# EAGLE board ray (EAGLE 9.5.1)
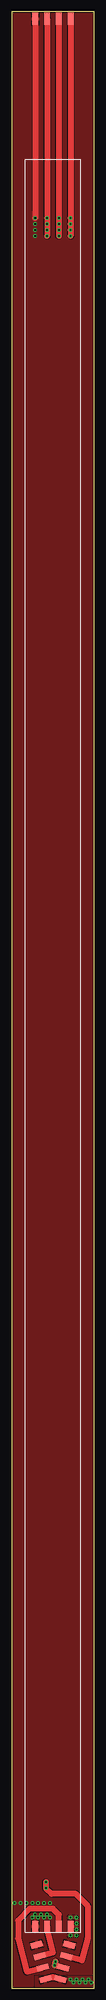
[diagram p0: board, top side]
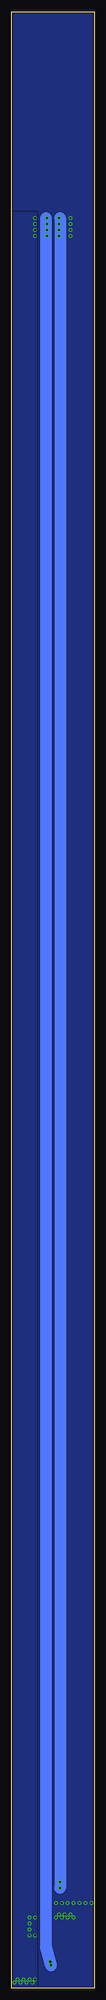
[diagram p1: board, bottom side, seen from below]

Size 17.78 x 425.45 mm. Coordinates in mm from the lower left corner, seen from the top.
Outline: 0,0 17.78,0 17.78,425.45 0,425.45 0,0
Copper layers (1*16): Top 0.035mm / dielectric 1.5mm / Bottom 0.035mm
Design rules "default *": minimum track width 6mil, minimum drill 0.35mm, track to track 6mil, track to pad 6mil, pad to pad 6mil, via to via 6mil, smd to smd 6mil, copper to edge 10mil, drill to drill 6mil, minimum pad ring 10mil, minimum via ring 8mil, stop-mask expansion 4mil, vias tented up to drill 14mil, thermal gap 10mil

## Footprints (pad centres in the part's own frame; a part is rotated, then mirrored left to right if it is on the bottom)
1X4-SMT = smd 1.27 x 2.54: 1 -3.81,0; 2 -1.27,0; 3 1.27,0; 4 3.81,0

## Placement (x,y rotation side)
L  1X4SMT  [1X4-SMT]  11.43,5.71 75 top
R  1X4SMT  [1X4-SMT]  6.35,5.71 105 top
T  1X4SMT  [1X4-SMT]  8.89,13.34 180 top
TT  1X4SMT  [1X4-SMT]  8.89,423.93 180 top

## Library data of the parts
L R T TT = adafruit

## Nets
5V: L.1 R.1 T.1 TT.1
GND: L.4 R.4 T.4 TT.4
RC: R.2 T.2
RD: R.3 T.3
TTC: L.2 TT.2
TTD: L.3 TT.3

## Tracks (layer width: path | path; a pad name or v marks a point on that pad's centre or on a via)
5V  (via drill 0.35)
  Top 1.27: L.1 8.89,2.45 R.1 | TT.1 v12.7,381 v12.7,379.73 v12.7,378.46 v12.7,377.19
  other vias: 13.34,1.27 13.97,1.91 14.61,1.27 15.24,1.91 15.88,1.27 12.7,15.24 16.51,1.91 12.7,1.91 17.14,1.27 12.7,11.43 13.97,15.24 13.97,11.43 13.97,13.97 13.97,12.7
  pour Top: 17.78,0 5.08,0 5.08,2.67 17.78,2.67
  pour Bottom: 17.78,0 12.27,0 12.27,382.27 17.78,382.27
  pour Top: 14.1,11.3 14.1,15.37 12.29,15.37 12.29,11.3
  pour Top: 5.33,0 17.78,0 17.78,2.41 5.33,2.41
GND  (via drill 0.35)
  Top 1.27: TT.4 v5.08,381
  other vias: 5.71,15.24 6.99,15.24 8.26,15.24 4.45,15.24 5.71,18.41 4.45,18.41 3.17,18.41 1.91,18.41 0.64,18.41 6.99,18.41 5.08,15.88 6.35,15.88 7.62,15.88 5.08,379.73 5.08,378.46 5.08,377.19 8.26,18.41
  pour Bottom (rank 2): 0,425.45 17.78,425.45 17.78,0 0,0
  pour Top (rank 2): 0,0 0,425.45 3.96,425.45 3.96,382.27 6.2,382.27 6.2,425.45 17.78,425.45 17.78,0
  pour Top (rank 2): 0,0 0,425.45 3.96,425.45 3.96,382.27 6.2,382.27 6.2,425.45 17.78,425.45 17.78,0
RC
  Top 1.27: T.2 10.16,15.88 8.89,17.14 3.94,17.14 1.4,14.61 1.4,10.69 3.3,3.58 R.2
RD
  Top 1.27: R.3 8.89,7.71 7.62,12.45 T.3
TTC  (via drill 0.35)
  Top 1.27: L.2 v9.27,4.98 v9.47,5.74 | TT.2 v10.16,381 v10.16,377.19
  Bottom 1.27: v10.16,377.19 v10.16,378.46 v10.16,379.73 v10.16,381 10.41,381
  Bottom 2.54: 10.41,381 10.41,9.24 v9.47,5.74 v9.27,4.98
TTD  (via drill 0.35)
  Top 1.27: L.3 15.11,6.04 16.38,10.78 16.38,17.78 13.84,20.32 8.64,20.32 v7.37,21.59 v7.37,22.86 | TT.3 v7.62,381 v7.62,377.19
  Bottom 1.27: v7.62,378.46 v7.62,379.73 v7.62,381 7.37,381
  Bottom 2.54: 7.37,381 v7.37,21.59